# Altium PCB Cook_It.PcbDoc
Units mil, origin at the board's own origin, x right, y up, seen from the top; angles counter-clockwise.
Board outline 6000 x 4000 mil, 2 copper layers (Top Layer, Bottom Layer); 64 components, 73 nets, 304 pads, 0 vias.
Unrouted connection lines stored in the file: 179.
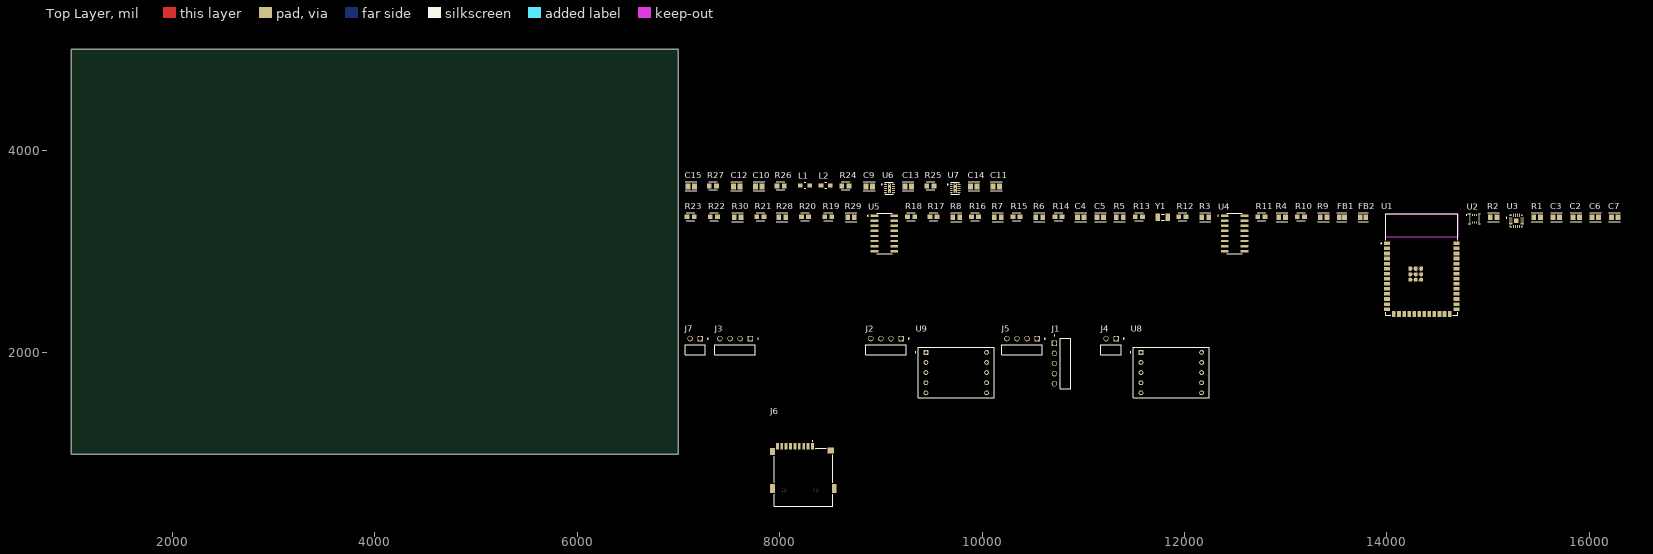
[diagram p0: Top Layer view]
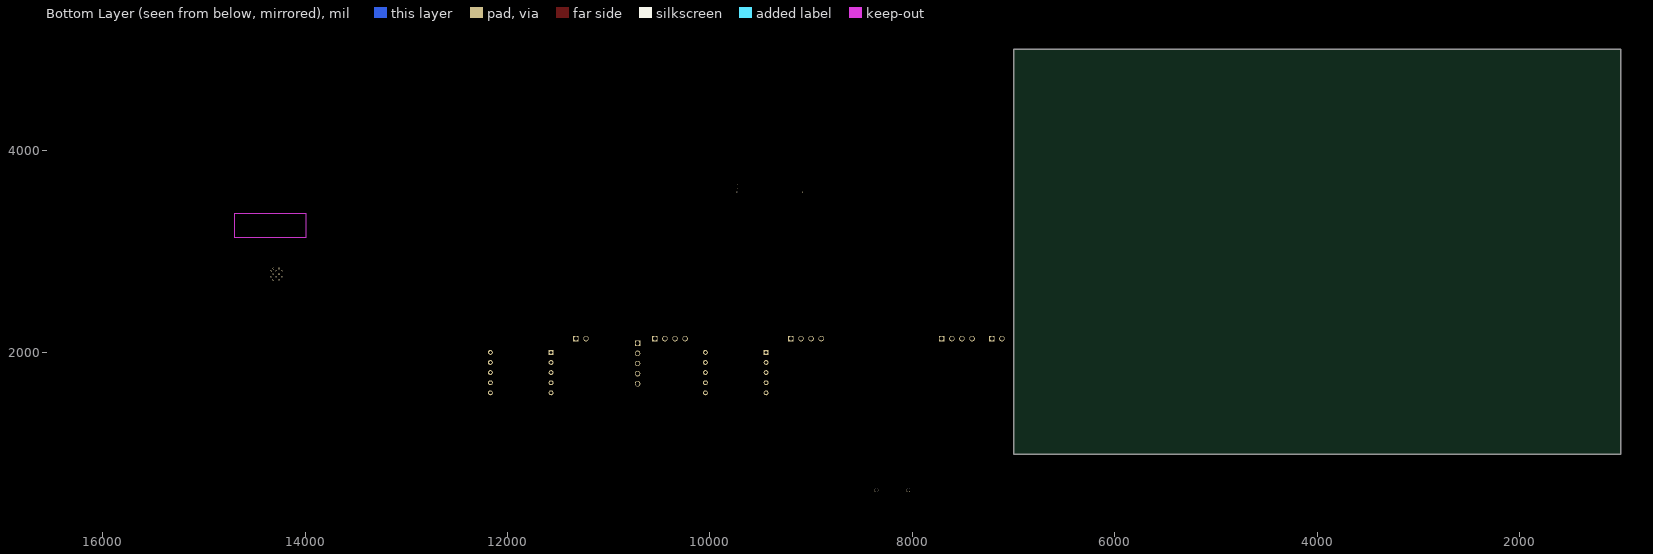
[diagram p1: Bottom Layer view, seen from below]

## Layer stack, top to bottom
Top Solder: solder mask 0.4, Solder Resist, Dk 3.5
Top Layer: signal copper 1.4
Dielectric 1: dielectric 12.6, FR-4, Dk 4.8
Bottom Layer: signal copper 1.4
Bottom Solder: solder mask 0.4, Solder Resist, Dk 3.5

## Board outline
1000,1000 7000,1000 7000,5000 1000,5000

## Design rules (kind name [scope] priority, off if disabled: settings)
Clearance [All] p1: gap=10 ignorepadtopadclearanceinfootprint=FALSE
PolygonConnect [All] p1: connectstyle=Relief reliefconductorwidth=10 reliefentries=4 polygonreliefangle="90 Angle" airgapwidth=10
RoutingVias [All] p1: holewidth=28 width=50 viastyle="Through Hole" minholewidth=28 minwidth=50 maxholewidth=28 maxwidth=50
SolderMaskExpansion [All] p1: expansion=4 istentingtop=FALSE
SupplyNets "Schematic Supply Nets" [InNet('GND')] p1: voltage=0.000
Width [All] p1: maxlimit=10 minlimit=10 preferedwidth=10
30 further rules are at their usual default settings.

## Classes and differential pairs
component class Power: C9 C10 C11 C12 C13 C14 C15 L1 L2 R24 R25 R26 R27 U6 U7
component class Cook_It: C2 C3 C4 C5 C6 C7 FB1 FB2 R1 R2 R3 R4 R5 R6 R7 R8 R9 R10 R11 R12 R13 R14 R15 R16 R17 R18 R19 R20 R21 R22 R23 R28 R29 R30 U1 U2 U3 U4 U5 Y1
component class Connectors: J1 J2 J3 J4 J5 J6 J7 U8 U9

## Components (designator, comment, footprint, x,y, rotation, side; value= is the part's Value field where it differs from the comment)
C2 "0.1u" FP-GRM21B-0_2-e0_2_0_7-IPC_B 15870,3340 r0 top
C3 "1u" FP-GRM21B-0_2-e0_2_0_7-IPC_B 15675,3340 r0 top
C4 "12p" FP-GRM21B-0_2-e0_2_0_7-IPC_B 10975,3340 r0 top
C5 "12p" FP-GRM21B-0_2-e0_2_0_7-IPC_B 11170,3340 r0 top
C6 "0.1u" FP-GRM21B-0_2-e0_2_0_7-IPC_B 16060,3340 r0 top
C7 "0.1u" FP-GRM21B-0_2-e0_2_0_7-IPC_B 16250,3340 r0 top
C9 "0.1u" FP-GRM21B-0_2-e0_2_0_7-IPC_B 8885,3645 r0 top
C10 "22u" FP-GRM21B-0_2-e0_2_0_7-IPC_B 7795,3645 r0 top
C11 "2.2u" FP-GRM21B-0_2-e0_2_0_7-IPC_B 10140,3645 r0 top
C12 "22u" FP-GRM21B-0_2-e0_2_0_7-IPC_B 7575,3645 r0 top
C13 "0.1u" FP-GRM21B-0_2-e0_2_0_7-IPC_B 9270,3645 r0 top
C14 "0.1u" FP-GRM21B-0_2-e0_2_0_7-IPC_B 9920,3645 r0 top
C15 "10u" FP-GRM21B-0_2-e0_2_0_7-IPC_B 7125,3645 r0 top
FB1 "" FP-BMB2A1000LN2-IPC_C 13555,3340 r0 top
FB2 "" FP-BMB2A1000LN2-IPC_C 13765,3340 r0 top
J1 "TSW-105-22-G-S-RA" SAMTEC_TSW-105-22-G-S-RA 10715,2095 r90 top
J2 "TSW-104-22-G-S-RA" SAMTEC_TSW-104-22-G-S-RA 9200,2140 r0 top
J3 "TSW-104-22-G-S-RA" SAMTEC_TSW-104-22-G-S-RA 7710,2140 r0 top
J4 "TSW-102-22-G-S-RA" SAMTEC_TSW-102-22-G-S-RA 11325,2140 r0 top
J5 "TSW-104-22-G-S-RA" SAMTEC_TSW-104-22-G-S-RA 10545,2140 r0 top
J6 "MSD-4-A" CUI_MSD-4-A 8235.32,771.22 r0 top
J7 "TSW-102-22-G-S-RA" SAMTEC_TSW-102-22-G-S-RA 7215,2140 r0 top
L1 "10u" FP-LQM21DN_70-MFG 8250,3655 r0 top
L2 "10u" FP-LQM21DN_70-MFG 8455,3655 r0 top
R1 "10k" FP-TFCR0805-IPC_B 15485,3340 r0 top
R2 "100k" FP-TFCR0805-IPC_B 15055,3340 r0 top
R3 "2.2k" FP-TFCR0805-IPC_B 12205,3340 r0 top
R4 "2.2k" FP-TFCR0805-IPC_B 12965,3340 r0 top
R5 "10k" FP-TFCR0805-IPC_B 11360,3340 r0 top
R6 "10k" FP-TFCR0805-IPC_B 10565,3340 r0 top
R7 "10k" FP-TFCR0805-IPC_B 10155,3340 r0 top
R8 "10k" FP-TFCR0805-IPC_B 9745,3340 r0 top
R9 "1M" FP-TFCR0805-IPC_B 13375,3340 r0 top
R10 "200" FP-TFCR0805-MFG 13150,3345 r0 top
R11 "200" FP-TFCR0805-MFG 12760,3345 r0 top
R12 "200" FP-TFCR0805-MFG 11980,3345 r0 top
R13 "200" FP-TFCR0805-MFG 11550,3345 r0 top
R14 "200" FP-TFCR0805-MFG 10755,3345 r0 top
R15 "200" FP-TFCR0805-MFG 10340,3345 r0 top
R16 "200" FP-TFCR0805-MFG 9930,3345 r0 top
R17 "200" FP-TFCR0805-MFG 9520,3345 r0 top
R18 "200" FP-TFCR0805-MFG 9300,3345 r0 top
R19 "200" FP-TFCR0805-MFG 8480,3345 r0 top
R20 "200" FP-TFCR0805-MFG 8250,3345 r0 top
R21 "200" FP-TFCR0805-MFG 7810,3345 r0 top
R22 "200" FP-TFCR0805-MFG 7350,3345 r0 top
R23 "200" FP-TFCR0805-MFG 7120,3345 r0 top
R24 "100k" FP-TFCR0805-MFG 8650,3650 r0 top
R25 "100k" FP-TFCR0805-MFG 9490,3650 r0 top
R26 "52.3k" FP-TFCR0805-MFG 8010,3650 r0 top
R27 "10k" FP-TFCR0805-MFG 7340,3650 r0 top
R28 "51k" FP-TFCR0805-IPC_B 8025,3340 r0 top
R29 "51k" FP-TFCR0805-IPC_B 8705,3340 r0 top
R30 "51k" FP-TFCR0805-IPC_B 7585,3340 r0 top
U1 "ESP32-S3-WROOM-1-N8R8" XCVR_ESP32S3WROOM1N8R8 14345,2875 r0 top
U2 "BMI270" XDCR_BMI270 14865,3325 r0 top
U3 "MAX98357AETE+T" QFN50P300X300X80-17N 15280,3305 r0 top
U4 "SN74LS47N" SOIC127P600X175-16N 12495,3180 r0 top
U5 "SN74LS47N" SOIC127P600X175-16N 9035,3180 r0 top
U6 "TPS62175DQCR" SON50P300X200X80-11N240X84 9085,3625 r0 top
U7 "TPS62175DQCR" SON50P300X200X80-11N240X84 9735,3625 r0 top
U8 "LDSC512RI" LED_LDSC512RI 11870,1805 r0 top
U9 "LDSC512RI" LED_LDSC512RI 9745,1805 r0 top
Y1 "32.768k" XTAL_ABS07-32.768KHZ-T 11785,3340 r0 top

## Footprints (in the part's own frame and the unit in brackets; to place one, negate y for a bottom-side part, rotate by r counter-clockwise, add the part's x,y. Pads: shape width x height; smd on the part's side, far side on the other; paste and mask are expansions set on the pad)
CUI_MSD-4-A [mm]
  rect 0.7x1.6 smd: 1(2.25,7.75) 2(1.15,7.75) 3(0.05,7.75) 4(-1.05,7.75) 5(-2.15,7.75) 6(-3.25,7.75) 7(-4.35,7.75) 8(-5.45,7.75) CD(-6.55,7.75)
  rect 1.2x1.8 smd: G1(-7.75,6.45)
  rect 1.6x1.5 smd: G2(6.85,6.7)
  rect 1.2x2.2 smd: G3(-7.75,-2.85) G4(7.75,-2.85)
  round 1 hole 1 unplated: ""(-4.95,-3.25) ""(3.05,-3.25)
  silkscreen extent -7.37,-7.25 7.37,9.2, body extent -0.63,0 15.52,15.05, height 1.8
FP-BMB2A1000LN2-IPC_C [mil]
  rect 45.45x51.43 smd paste+0 mask+0: 1(-26.61,0) 2(26.61,0)
  silkscreen extent -49,-43 49,43, body extent -53,-31 53,31, height 10
FP-GRM21B-0_2-e0_2_0_7-IPC_B [mil]
  rect 49.4x57.33 smd paste+0 mask+0: 1(-32.51,0) 2(32.51,0)
  silkscreen extent -57,-44 57,44, body extent -67,-39 67,39, height 10
FP-LQM21DN_70-MFG [mm]
  rect 1.15x1 smd paste+0 mask+0: 1(-1.175,0) 2(1.175,0)
  silkscreen extent -0.23,-0.72 0.23,0.72, body extent -1.85,-0.82 1.85,0.82, height 0.25
FP-TFCR0805-IPC_B [mil]
  rect 45.5x55.44 smd paste+0 mask+0: 1(-33.51,0) 2(33.51,0)
  silkscreen extent -56,-43 56,43, body extent -66,-38 66,38, height 10
FP-TFCR0805-MFG [mm]
  rect 1.2x1.2 smd paste+0 mask+0: 1(-0.9,0) 2(0.9,0)
  silkscreen extent -1.07,-1 1.07,1, body extent -1.6,-0.8 1.6,0.8, height 0.25
LED_LDSC512RI [mm]
  rect 1.218x1.218 / inner round 1.218 / far side rect 1.218x1.218 hole 0.71: 1(-7.62,5.08)
  round 1.218 hole 0.71: 2(-7.62,2.54) 3(-7.62,0) 4(-7.62,-2.54) 5(-7.62,-5.08) 6(7.62,-5.08) 7(7.62,-2.54) 8(7.62,0) 9(7.62,2.54) 10(7.62,5.08)
  silkscreen extent -10.35,-6.3 9.5,6.3, body extent -6.3,-9.5 6.3,9.5, height 8
QFN50P300X300X80-17N [mm]
  rrect25% 0.84x0.27 smd: 1(-1.435,0.75) 2(-1.435,0.25) 3(-1.435,-0.25) 4(-1.435,-0.75) 9(1.435,-0.75) 10(1.435,-0.25) 11(1.435,0.25) 12(1.435,0.75)
  rrect25% 0.27x0.84 smd: 5(-0.75,-1.435) 6(-0.25,-1.435) 7(0.25,-1.435) 8(0.75,-1.435) 13(0.75,1.435) 14(0.25,1.435) 15(-0.25,1.435) 16(-0.75,1.435)
  rect 1.1x1.1 smd paste-0.2: 17(0,0)
  silkscreen extent -2.57,-1.5 1.5,1.5, body extent -1.5,-1.5 1.5,1.5, height 0.9
SAMTEC_TSW-102-22-G-S-RA [mm]
  rect 1.37x1.37 hole 1.02: 01(0,0)
  round 1.37 hole 1.02: 02(-2.54,0)
  silkscreen extent -3.81,-4.04 2.02,0.1
SAMTEC_TSW-104-22-G-S-RA [mm]
  rect 1.37x1.37 / inner round 1.37 / far side rect 1.37x1.37 hole 1.02: 01(0,0)
  round 1.37 hole 1.02: 02(-2.54,0) 03(-5.08,0) 04(-7.62,0)
  silkscreen extent -8.89,-4.04 2.02,0.1
SAMTEC_TSW-105-22-G-S-RA [mm]
  rect 1.37x1.37 hole 1.02: 01(0,0)
  round 1.37 hole 1.02: 02(-2.54,0) 03(-5.08,0) 04(-7.62,0) 05(-10.16,0)
  silkscreen extent -11.43,-4.04 2.02,0.1
SOIC127P600X175-16N [mm]
  rrect25% 1.97x0.6 smd: 1(-2.475,4.445) 2(-2.475,3.175) 3(-2.475,1.905) 4(-2.475,0.635) 5(-2.475,-0.635) 6(-2.475,-1.905) 7(-2.475,-3.175) 8(-2.475,-4.445) 9(2.475,-4.445) 10(2.475,-3.175) 11(2.475,-1.905) 12(2.475,-0.635) 13(2.475,0.635) 14(2.475,1.905) 15(2.475,3.175) 16(2.475,4.445)
  silkscreen extent -4.24,-5.06 1.95,5.06
SON50P300X200X80-11N240X84 [mm]
  rrect7% 0.74x0.27 smd: 1(-0.995,1) 2(-0.995,0.5) 3(-0.995,0) 4(-0.995,-0.5) 5(-0.995,-1) 6(0.995,-1) 7(0.995,-0.5) 8(0.995,0) 9(0.995,0.5) 10(0.995,1)
  rect 0.84x2.4 smd paste-2: 11(0,0)
  round 0.3 hole 0.2: 11_1(0,0.95) 11_2(0,0) 11_3(0,-0.95)
  silkscreen extent -2,-1.5 1,1.5, body extent -1.5,-1 1.5,1, height 0.8
XCVR_ESP32S3WROOM1N8R8 [mm]
  rect 1.5x0.9 smd: 1(-8.75,5.26) 2(-8.75,3.99) 3(-8.75,2.72) 4(-8.75,1.45) 5(-8.75,0.18) 6(-8.75,-1.09) 7(-8.75,-2.36) 8(-8.75,-3.63) 9(-8.75,-4.9) 10(-8.75,-6.17) 11(-8.75,-7.44) 12(-8.75,-8.71) 13(-8.75,-9.98) 14(-8.75,-11.25) 27(8.75,-11.25) 28(8.75,-9.98) 29(8.75,-8.71) 30(8.75,-7.44) 31(8.75,-6.17) 32(8.75,-4.9) 33(8.75,-3.63) 34(8.75,-2.36) 35(8.75,-1.09) 36(8.75,0.18) 37(8.75,1.45) 38(8.75,2.72) 39(8.75,3.99) 40(8.75,5.26)
  rect 0.9x1.5 smd: 15(-6.985,-12.5) 16(-5.715,-12.5) 17(-4.445,-12.5) 18(-3.175,-12.5) 19(-1.905,-12.5) 20(-0.635,-12.5) 21(0.635,-12.5) 22(1.905,-12.5) 23(3.175,-12.5) 24(4.445,-12.5) 25(5.715,-12.5) 26(6.985,-12.5)
  rect 0.9x0.9 smd: 41_1(-1.5,-2.46) 41_2(-2.9,-2.46) 41_3(-0.1,-2.46) 41_4(-2.9,-3.86) 41_5(-1.5,-3.86) 41_6(-0.1,-3.86) 41_7(-2.9,-1.06) 41_8(-1.5,-1.06) 41_9(-0.1,-1.06)
  round 0.4 hole 0.2 mask+0: 41_10(-1.5,-1.76) 41_11(-2.9,-1.76) 41_12(-0.1,-1.76) 41_13(-2.9,-3.16) 41_14(-1.5,-3.16) 41_15(-0.1,-3.16) 41_16(-2.2,-1.06) 41_17(-0.8,-1.06) 41_18(-2.2,-2.46) 41_19(-0.8,-2.46) 41_20(-2.2,-3.86) 41_21(-0.8,-3.86)
  Keep-Out Layer region: 9,6.75 -9,6.75 -9,12.75 9,12.75
  Keep-Out Layer region: 9,6.75 -9,6.75 -9,12.75 9,12.75
  silkscreen extent -10.3,-12.75 9,12.75, body extent -9,-12.75 9,12.75, height 3.25
XDCR_BMI270 [mm]
  rect 0.475x0.25 smd: 1(-1.162,0.75) 2(-1.162,0.25) 3(-1.162,-0.25) 4(-1.162,-0.75) 8(1.162,-0.75) 9(1.162,-0.25) 10(1.162,0.25) 11(1.162,0.75)
  rect 0.25x0.475 smd: 5(-0.5,-0.913) 6(0,-0.913) 7(0.5,-0.913) 12(0.5,0.913) 13(0,0.913) 14(-0.5,0.913)
  silkscreen extent -2.07,-1.25 1.5,1.25, body extent -1.5,-1.25 1.5,1.25, height 0.87
XTAL_ABS07-32.768KHZ-T [mm]
  rect 1.1x1.9 smd: 1(-1.25,0) 2(1.25,0)
  silkscreen extent -0.38,-0.75 0.38,0.75, body extent -1.6,-0.75 1.6,0.75, height 0.89

## Part data
C2 C3 C4 C5 C6 C7 C9 C10 C11 C12 C13 C14 C15: library part CMP-06035-063309-1, "CAP CER 2.2UF 100V X7T 0805"
FB1 FB2: library part CMP-03232-000001-1, "FERRITE BEAD 1 KOHM 0805 1LN", Case Code (Imperial)=0805, Case Code (Metric)=2012, DC Resistance (DCR)=300mR, Max Current Rating=350mA, Max Operating Temperature=125°C, Min Operating Temperature=-55°C, Resistor Type="Ferrite Bead", Tolerance=25%, Case/Package=0805, Core Material=Ferrite, Depth=1.4mm, ELV=Compliant, Height=1.1mm, Impedance=1kR, Lead/Base Style=SMD/SMT, Max DC Current=350mA, Mount="Surface Mount", Number of Lines=1, Number of Pins=2, Packaging="Tape and Reel", RoHS Compliant=Yes, Series=BMB-L
J1: "Conn Unshrouded Header HDR 5 POS 2.54mm Solder RA Side Entry Thru-Hole Bulk", Package=None, Availability="In Stock", Check_prices=https://www.snapeda.com/parts/TSW-105-22-G-S-RA/Samtec/view-part/?ref=eda, MF=Samtec, MP=TSW-105-22-G-S-RA, Price=None, Purchase-URL=https://pricing.snapeda.com/search/part/TSW-105-22-G-S-RA/?ref=eda, SnapEDA_Link=https://www.snapeda.com/parts/TSW-105-22-G-S-RA/Samtec/view-part/?ref=snap
J2 J3 J4 J5 J7: Package=None, Availability=Unavailable, MF=Samtec, Price=None
  J2 J3 J5: MP=TSW-104-22-G-S-RA
  J4 J7: MP=TSW-102-22-G-S-RA
J6: "Micro SD Card Connector, 9 Positions, Connector and Ejector, Push In, Auto Eject Out, Surface Mount, 1.8 mm Height Above Board, Gold Flash", Package=None, Check_prices=https://www.snapeda.com/parts/MSD-4-A/Same+Sky/view-part/?ref=eda, MF="Same Sky", MP=MSD-4-A, SnapEDA_Link=https://www.snapeda.com/parts/MSD-4-A/Same+Sky/view-part/?ref=snap
L1 L2: library part CMP-00260-111578617-1, "LQM21DN330M70L Multilayer Inductor, 33 µH, 2.99 ohm, 16 MHz, 200 mA, 0805 [2012 Metric], LQM", Case/Package=0805, Current Rating=200mA, Inductance=33µH, Manufacturer Lifecycle Status="IN PRODUCTION NEW", Max Operating Temperature=125°C, Min Operating Temperature=-55°C, Resistance=2.99Ω, Saturation Current=80mA, Self Resonant Frequency=16MHz, Test Frequency=1MHz, Tolerance=20%, Core Material=Ferrite, Height=1.45mm, NexarPartId=111578617, RMS Current (Irms)=200mA, Schedule B="8504500000, 8504500000", Series Resistance=2.99Ω
R1 R2 R3 R4 R5 R6 R7 R8 R9 R28 R29 R30: library part CMP-250906-214896-1, "RES Thin Film,  499kΩ, 0.1%, 0.125W, 25ppm/°C, 0805"
R10 R11 R12 R13 R14 R15 R16 R17 R18 R19 R20 R21 R22 R23 R24 R25 R26 R27: library part CMP-250906-142014-1, "RES Thin Film,  1.72kΩ, 1%, 0.125W, 25ppm/°C, 0805"
U1: "Bluetooth, WiFi 802.11b/g/n, Bluetooth v5.0 Transceiver Module 2.4GHz PCB Trace Surface Mount", Package=None, Availability="In Stock", Check_prices=https://www.snapeda.com/parts/ESP32-S3-WROOM-1-N8R8/Espressif+Systems/view-part/?ref=eda, MF="Espressif Systems", MP=ESP32-S3-WROOM-1-N8R8, Price=None, Purchase-URL=https://pricing.snapeda.com/search?q=ESP32-S3-WROOM-1-N8R8&ref=eda, SnapEDA_Link=https://www.snapeda.com/parts/ESP32-S3-WROOM-1-N8R8/Espressif+Systems/view-part/?ref=snap
U2: "Accelerometer, Gyroscope, 6 Axis Sensor IÂ²C, SPI Output", Package="LGA-14 Bosch Sensortec", Check_prices=https://www.snapeda.com/parts/BMI270/Bosch+Sensortec/view-part/?ref=eda, Digi-Key_Part_Number=828-1091-2-ND, MF="Bosch Sensortec", MP=BMI270, Purchase-URL=https://pricing.snapeda.com/search/part/BMI270/?ref=eda, SnapEDA_Link=https://www.snapeda.com/parts/BMI270/Bosch+Sensortec/view-part/?ref=snap
U3: "Tiny, Low-Cost, PCM Class D Amplifier with Class AB Performance", Package="TQFN-16 Maxim", Check_prices=https://www.snapeda.com/parts/MAX98357AETE+T/Analog+Devices/view-part/?ref=eda, MF="Analog Devices", MP=MAX98357AETE+T, SnapEDA_Link=https://www.snapeda.com/parts/MAX98357AETE+T/Analog+Devices/view-part/?ref=snap
U4 U5: "Decoder/Driver Single 4-to-7 16-Pin PDIP Tube", Package=None, Check_prices=https://www.snapeda.com/parts/SN74LS47N/Onsemi/view-part/?ref=eda, MF=onsemi, MP=SN74LS47N, SnapEDA_Link=https://www.snapeda.com/parts/SN74LS47N/Onsemi/view-part/?ref=snap
U6 U7: "28V, 0.5A Step-Down Converter with SNOOZE Mode 10-WSON -40 to 85", Package="WSON-10 Texas Instruments", Availability=Good, Check_prices=https://www.snapeda.com/parts/TPS62175DQCR/Texas%20Instruments/view-part/494000/?ref=eda, MF="Texas Instruments", MP=TPS62175DQCR, Price=None, Purchase-URL=https://pricing.snapeda.com/search/part/TPS62175DQCR/?ref=eda, SnapEDA_Link=https://www.snapeda.com/parts/TPS62175DQCR/Texas%20Instruments/view-part/494000/?ref=snap
U8 U9: ".56IN. 7 SEGMENT SINGLE DISPLAY, 565NM GREEN, GRAY FACE, WHITE SEGMENTS, COMMON", Package=None, Check_prices=https://www.snapeda.com/parts/LDS-C512RI/Lumex/view-part/?ref=eda, MF=Lumex, MP=LDS-C512RI, SnapEDA_Link=https://www.snapeda.com/parts/LDS-C512RI/Lumex/view-part/?ref=snap
Y1: library part ABS07-32.768KHZ-T, "32.768 kHz Â±20ppm Crystal 12.5pF 70 kOhms 2-SMD, No Lead", Package="SMD-2 Abracon LLC", Availability="In Stock", Check_prices=https://www.snapeda.com/parts/ABS07-32.768KHZ-T/Abracon+LLC/view-part/?ref=eda, MF=Abracon, MP=ABS07-32.768KHZ-T, Price=None, Purchase-URL=https://pricing.snapeda.com/search/part/ABS07-32.768KHZ-T/?ref=eda, SnapEDA_Link=https://www.snapeda.com/parts/ABS07-32.768KHZ-T/Abracon+LLC/view-part/?ref=snap

## Nets (pads, with @x,y where several pads share a name; then routed paths per layer and width w, separated by ;. In a path a pad name is that pad's centre, name@x,y a point inside that pad or via, vN(x,y) a via of type N, cw(c..) or ccw(c..) an arc to the next point about the centre after c; other vN are vias at no path point)
3V3: C2.1 C6.1 C10.1 J1.01 J2.01 J6.4 L1.2 R1.1 R2.1 R3.1 R4.1 R5.1 R6.1 R7.1 R8.1 R24.2 U1.2 U2.5 U2.8 U6.10
5V: C7.1 C12.1 J3.01 J5.01 L2.2 R9.2 R25.2 R26.1 U3.7 U3.8 U4.16 U5.16 U7.10 U8.3 U8.8 U9.3 U9.8
9V: C9.1 C11.1 C13.1 C14.1 C15.1 J4.01 U6.2 U6.3 U6.8 U7.2 U7.3 U7.8
A1: U1.34 U4.7
A2: U1.30 U5.7
B1: U1.39 U4.1
B2: U1.33 U5.1
BCLK_MAX: U1.21 U3.16
C1: U1.38 U4.2
C2: U1.32 U5.2
CLK_SD: J6.5 R8.2 U1.6
CLK_Strip: J3.02 U1.25
CS_SD: J6.CD R5.2 U1.4
D1: U1.35 U4.6
D2: U1.31 U5.6
Data_Strip: J3.03 U1.24
DIN_MAX: U1.19 U3.1
GND: C2.2 C3.2 C4.2 C5.2 C6.2 C7.2 C9.2 C10.2 C11.2 C12.2 C13.2 C14.2 C15.2 J1.05 J3.04 J4.02 J5.04 J6.6 J6.G1 J6.G2 J6.G3 J6.G4 R27.2 R28.2 R29.2 R30.2 U1.1 U1.40 U1.41_1 U1.41_2 U1.41_3 U1.41_4 U1.41_5 U1.41_6 U1.41_7 U1.41_8 U1.41_9 U2.6 U2.7 U3.3 U3.11 U3.15 U3.17 U4.8 U5.8 U6.1 U6.5 U6.6 U6.11 U6.11_1 U6.11_2 U6.11_3 U7.1 U7.6 U7.11 U7.11_1 U7.11_2 U7.11_3
Hall_1: J1.02 U1.23
Hall_2: J1.03 U1.26
Hall_3: J1.04 U1.16
LRCLK_MAX: U1.20 U3.14
MISO_SD: J6.7 R7.2 U1.7
MOSI_SD: J6.3 R6.2 U1.5
N_OUT: FB2.2 J7.02
NetC3_1: C3.1 R1.2 U1.3
NetC4_1: C4.1 U1.8 Y1.2
NetC5_1: C5.1 U1.9 Y1.1
NetFB1_1: FB1.1 U3.9
NetFB2_1: FB2.1 U3.10
NetL1_1: L1.1 U6.9
NetL2_1: L2.1 U7.9
NetR2_2: R2.2 U2.12
NetR9_1: R9.1 U3.4
NetR10_1: R10.1 U4.13
NetR11_1: R11.1 U4.12
NetR12_1: R12.1 U4.11
NetR13_1: R13.1 U4.10
NetR14_1: R14.1 U4.9
NetR15_1: R15.1 U4.15
NetR16_1: R16.1 U4.14
NetR17_1: R17.1 U5.13
NetR18_1: R18.1 U5.12
NetR19_1: R19.1 U5.11
NetR20_1: R20.1 U5.10
NetR21_1: R21.1 U5.9
NetR22_1: R22.1 U5.15
NetR23_1: R23.1 U5.14
NetR24_1: R24.1 U6.7
NetR25_1: R25.1 U7.7
NetR26_2: R26.2 R27.1 U7.5
P_1: J2.02 R29.1 U1.27
P_2: J2.03 R28.1 U1.15
P_3: J2.04 R30.1 U1.18
P_OUT: FB1.2 J7.01
Rx_ESP: J5.02 U1.36
sa1: R10.2 U8.7
sa2: R17.2 U9.7
sb1: R11.2 U8.6
sb2: R18.2 U9.6
sc1: R12.2 U8.4
sc2: R19.2 U9.4
SCL_IMU: R3.2 U1.17 U2.13
sd1: R13.2 U8.2
sd2: R20.2 U9.2
SDA_IMU: R4.2 U1.12 U2.14
se1: R14.2 U8.1
se2: R21.2 U9.1
sf1: R15.2 U8.9
sf2: R22.2 U9.9
sg1: R16.2 U8.10
sg2: R23.2 U9.10
Tx_ESP: J5.03 U1.37
pads on no net: J6. J6.1 J6.2 J6.8 U1.10 U1.11 U1.13 U1.14 U1.22 U1.28 U1.29 U1.41_10 U1.41_11 U1.41_12 U1.41_13 U1.41_14 U1.41_15 U1.41_16 U1.41_17 U1.41_18 U1.41_19 U1.41_20 U1.41_21 U2.1 U2.2 U2.3 U2.4 U2.9 U2.10 U2.11 U3.2 U3.5 U3.6 U3.12 U3.13 U4.3 U4.4 U4.5 U5.3 U5.4 U5.5 U6.4 U7.4 U8.5 U9.5

## Text inside footprints (layer, text, board x,y; h text height)
U1: Top 3D Body "ANTENNA" at 14167.83,3249.02 h50